# Altium PCB layout.PcbDoc (part 3 of 11)
Units mil, origin at the board's own origin, x right, y up, seen from the top; angles counter-clockwise.
Board outline 3543.31 x 3149.61 mil, 2 copper layers (Top Layer, Bottom Layer); 78 components, 73 nets, 327 pads, 143 vias.
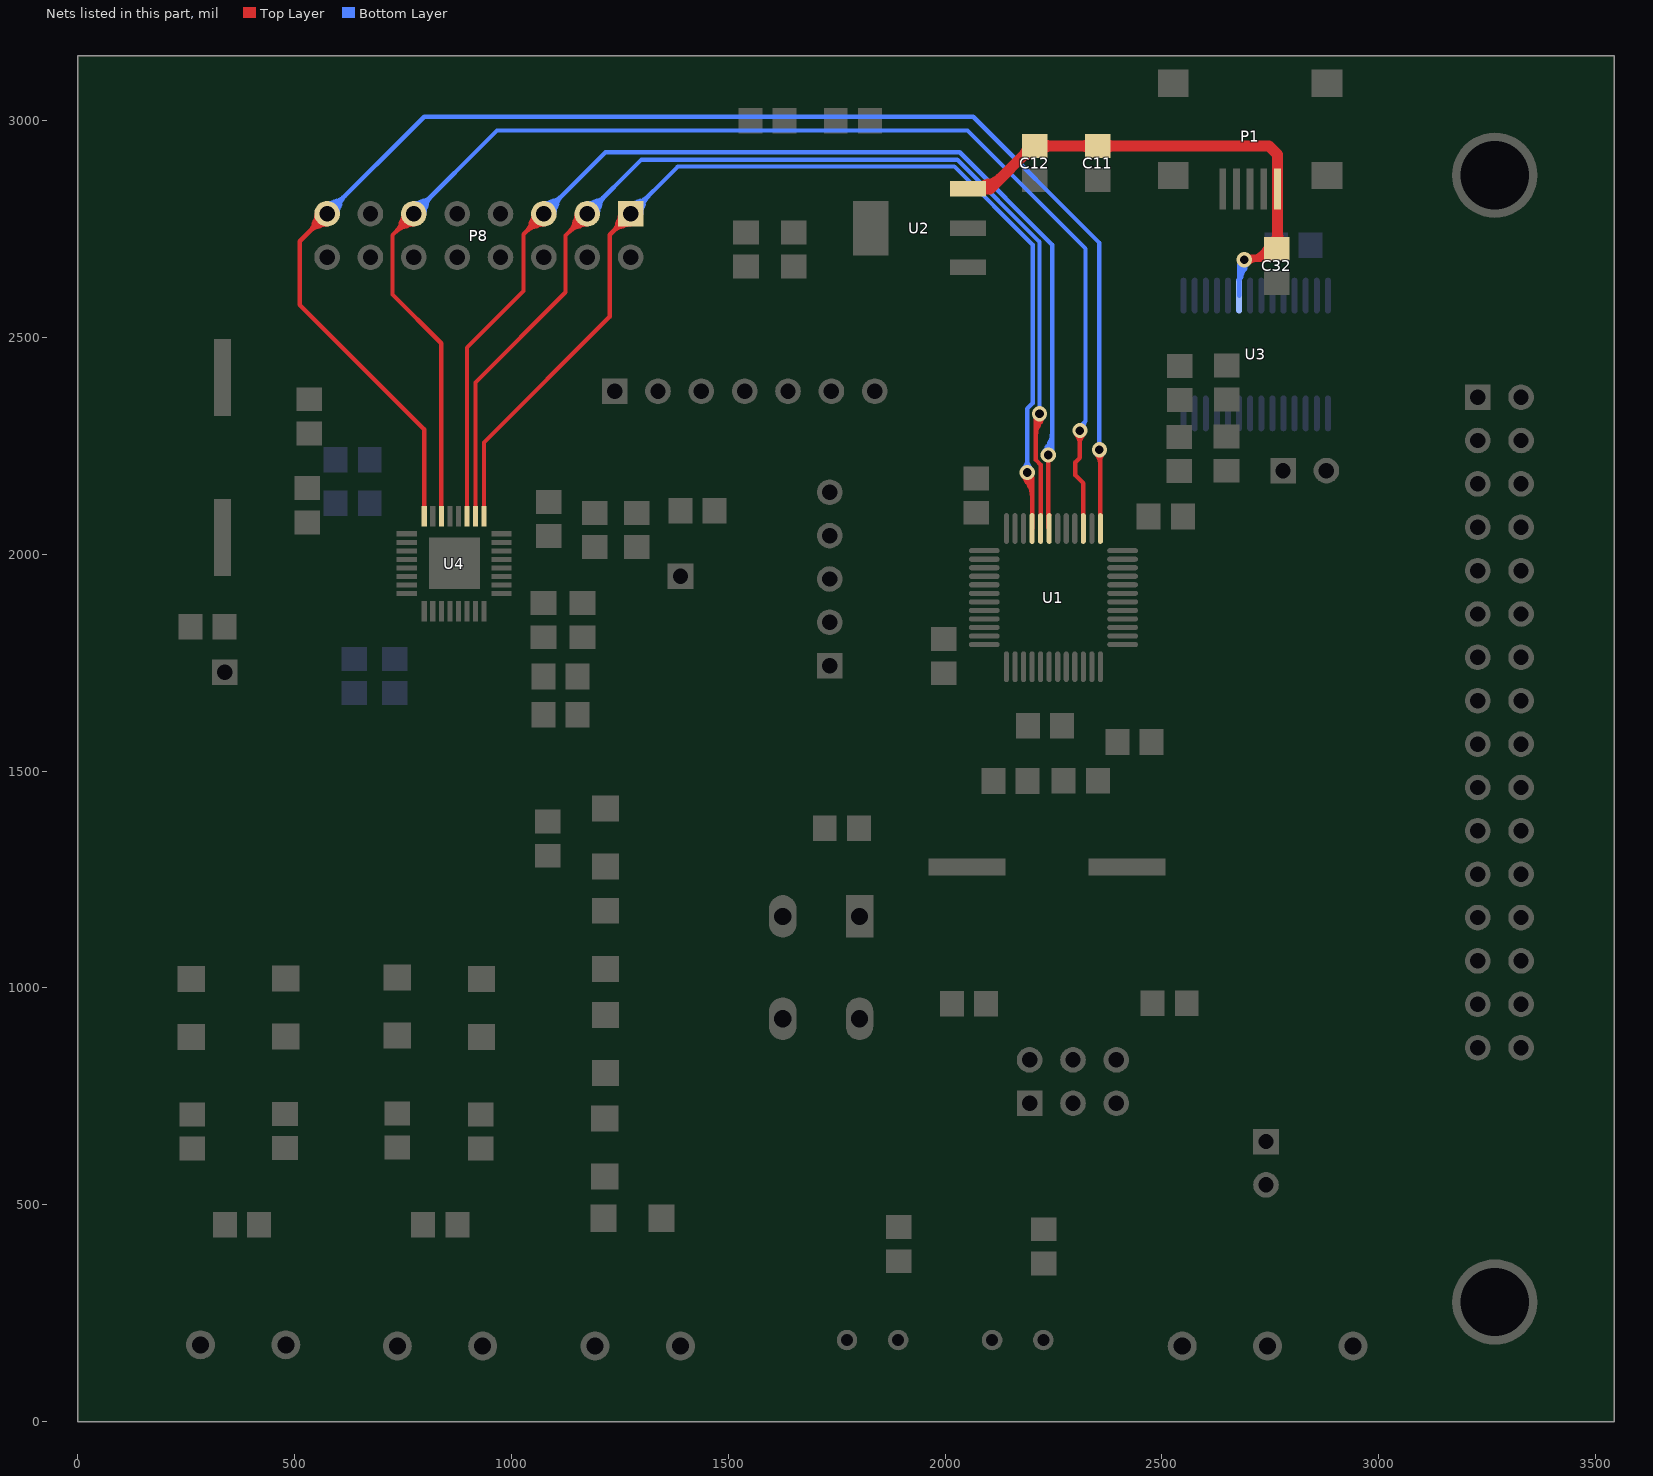
[diagram p3: the nets of this part, all layers, seen from the top]

## Via types
v1: diameter 35, hole 20, Top Layer to Bottom Layer, tented both sides, 113 vias
v2: diameter 35, hole 20, Top Layer to Bottom Layer, 28 vias
v3: diameter 35.43, hole 35.43, Top Layer to Bottom Layer, 2 vias

## Nets (pads, with @x,y where several pads share a name; then routed paths per layer and width w, separated by ;. In a path a pad name is that pad's centre, name@x,y a point inside that pad or via, vN(x,y) a via of type N, cw(c..) or ccw(c..) an arc to the next point about the centre after c; other vN are vias at no path point) (continued)
5V: C11.2 C12.2 C32.2 P1.1 U2.3 U3.20 | length 7242.4
  Top Layer w10: C32.2@2766.55,2705.92 C32.2@2765,2704.37 2739.63,2679 v2(2690,2679) ; v2(2690,2679) ccw(c2690,2736.04) C32.2@2742.34,2713.35 ; v2(2690,2679) ccw(c2690,2736.04) C32.2@2742.34,2713.35 ; v2(2690,2679) ccw(c2690,2736.04) C32.2@2742.34,2713.35 ; v2(2690,2679) ccw(c2690,2736.04) C32.2@2742.34,2713.35 ; v2(2690,2679) ccw(c2690,2736.04) C32.2@2742.34,2713.35 ; v2@2696.42,2689.73 ccw(c2711.11,2714.29) 2718.52,2686.64 ; v2@2696.42,2689.73 ccw(c2711.11,2714.29) 2718.52,2686.64 ; v2@2696.42,2689.73 ccw(c2711.11,2714.29) 2718.52,2686.64 ; v2@2696.42,2689.73 ccw(c2711.11,2714.29) 2718.52,2686.64 ; v2@2696.42,2689.73 ccw(c2711.11,2714.29) 2718.52,2686.64 ; v2@2696.42,2689.73 ccw(c2711.11,2714.29) 2718.52,2686.64 ; v2@2696.42,2689.73 ccw(c2711.11,2714.29) 2718.52,2686.64 ; v2@2696.42,2689.73 ccw(c2711.11,2714.29) 2718.52,2686.64 ; v2@2696.42,2689.73 ccw(c2711.11,2714.29) 2718.52,2686.64 ; v2@2696.42,2689.73 ccw(c2711.11,2714.29) 2718.52,2686.64 ; v2@2696.42,2689.73 ccw(c2711.11,2714.29) 2718.52,2686.64 ; v2@2696.42,2689.73 ccw(c2711.11,2714.29) 2718.52,2686.64 ; v2@2696.42,2689.73 ccw(c2711.11,2714.29) 2718.52,2686.64 ; v2@2696.42,2689.73 ccw(c2711.11,2714.29) 2718.52,2686.64 ; v2@2696.42,2689.73 ccw(c2711.11,2714.29) 2718.52,2686.64 ; v2@2697.46,2689.03 ccw(c2715.87,2713.79) 2723.86,2683.99 ; v2@2697.46,2689.03 ccw(c2715.87,2713.79) 2723.86,2683.99 ; v2@2697.46,2689.03 ccw(c2715.87,2713.79) 2723.86,2683.99 ; v2@2697.46,2689.03 ccw(c2715.87,2713.79) 2723.86,2683.99 ; v2@2697.46,2689.03 ccw(c2715.87,2713.79) 2723.86,2683.99 ; v2@2697.46,2689.03 ccw(c2715.87,2713.79) 2723.86,2683.99 ; v2@2697.46,2689.03 ccw(c2715.87,2713.79) 2723.86,2683.99 ; v2@2697.46,2689.03 ccw(c2715.87,2713.79) 2723.86,2683.99 ; v2@2697.46,2689.03 ccw(c2715.87,2713.79) 2723.86,2683.99 ; v2@2697.46,2689.03 ccw(c2715.87,2713.79) 2723.86,2683.99 ; v2@2697.46,2689.03 ccw(c2715.87,2713.79) 2723.86,2683.99 ; v2@2697.46,2689.03 ccw(c2715.87,2713.79) 2723.86,2683.99 ; v2@2697.46,2689.03 ccw(c2715.87,2713.79) 2723.86,2683.99 ; v2@2697.46,2689.03 ccw(c2715.87,2713.79) 2723.86,2683.99 ; v2@2697.46,2689.03 ccw(c2715.87,2713.79) 2723.86,2683.99 ; v2@2698.84,2670.16 cw(c2720.18,2648.82) 2720.18,2679 ; v2@2698.84,2670.16 cw(c2720.18,2648.82) 2720.18,2679 ; v2@2698.84,2670.16 cw(c2720.18,2648.82) 2720.18,2679 ; v2@2698.84,2670.16 cw(c2720.18,2648.82) 2720.18,2679 ; v2@2698.84,2670.16 cw(c2720.18,2648.82) 2720.18,2679 ; v2@2698.84,2687.84 ccw(c2720.18,2709.18) 2720.18,2679 ; v2@2698.84,2687.84 ccw(c2720.18,2709.18) 2720.18,2679 ; v2@2698.84,2687.84 ccw(c2720.18,2709.18) 2720.18,2679 ; v2@2698.84,2687.84 ccw(c2720.18,2709.18) 2720.18,2679 ; v2@2698.84,2687.84 ccw(c2720.18,2709.18) 2720.18,2679 ; v2@2700.83,2672.75 cw(c2715.3,2664.39) 2710.97,2680.54 ; v2@2700.83,2672.75 cw(c2715.3,2664.39) 2710.97,2680.54 ; v2@2700.83,2672.75 cw(c2715.3,2664.39) 2710.97,2680.54 ; v2@2700.83,2672.75 cw(c2715.3,2664.39) 2710.97,2680.54 ; v2@2700.83,2672.75 cw(c2715.3,2664.39) 2710.97,2680.54 ; v2@2700.83,2672.75 cw(c2715.3,2664.39) 2710.97,2680.54 ; v2@2700.83,2672.75 cw(c2715.3,2664.39) 2710.97,2680.54 ; v2@2700.83,2672.75 cw(c2715.3,2664.39) 2710.97,2680.54 ; v2@2700.83,2672.75 cw(c2715.3,2664.39) 2710.97,2680.54 ; v2@2700.83,2672.75 cw(c2715.3,2664.39) 2710.97,2680.54 ; v2@2700.83,2672.75 cw(c2715.3,2664.39) 2710.97,2680.54 ; v2@2700.83,2672.75 cw(c2715.3,2664.39) 2710.97,2680.54 ; v2@2700.83,2672.75 cw(c2715.3,2664.39) 2710.97,2680.54 ; v2@2700.83,2672.75 cw(c2715.3,2664.39) 2710.97,2680.54 ; v2@2700.83,2672.75 cw(c2715.3,2664.39) 2710.97,2680.54 ; v2@2700.92,2672.92 cw(c2725.93,2658.99) 2718.52,2686.64 ; v2@2700.92,2672.92 cw(c2725.93,2658.99) 2718.52,2686.64 ; v2@2700.92,2672.92 cw(c2725.93,2658.99) 2718.52,2686.64 ; v2@2700.92,2672.92 cw(c2725.93,2658.99) 2718.52,2686.64 ; v2@2700.92,2672.92 cw(c2725.93,2658.99) 2718.52,2686.64 ; v2@2700.92,2672.92 cw(c2725.93,2658.99) 2718.52,2686.64 ; v2@2700.92,2672.92 cw(c2725.93,2658.99) 2718.52,2686.64 ; v2@2700.92,2672.92 cw(c2725.93,2658.99) 2718.52,2686.64 ; v2@2700.92,2672.92 cw(c2725.93,2658.99) 2718.52,2686.64 ; v2@2700.92,2672.92 cw(c2725.93,2658.99) 2718.52,2686.64 ; v2@2700.92,2672.92 cw(c2725.93,2658.99) 2718.52,2686.64 ; v2@2700.92,2672.92 cw(c2725.93,2658.99) 2718.52,2686.64 ; v2@2700.92,2672.92 cw(c2725.93,2658.99) 2718.52,2686.64 ; v2@2700.92,2672.92 cw(c2725.93,2658.99) 2718.52,2686.64 ; v2@2700.92,2672.92 cw(c2725.93,2658.99) 2718.52,2686.64 ; v2@2705.24,2679 ccw(c2705.24,2729.43) C32.2@2751.51,2709.37 ; v2@2705.24,2679 ccw(c2705.24,2729.43) C32.2@2751.51,2709.37 ; v2@2705.24,2679 ccw(c2705.24,2729.43) C32.2@2751.51,2709.37 ; v2@2705.24,2679 ccw(c2705.24,2729.43) C32.2@2751.51,2709.37 ; v2@2705.24,2679 ccw(c2705.24,2729.43) C32.2@2751.51,2709.37 ; 2720.48,2679 ccw(c2720.48,2722.83) C32.2@2760.68,2705.39 ; 2720.48,2679 ccw(c2720.48,2722.83) C32.2@2760.68,2705.39 ; 2720.48,2679 ccw(c2720.48,2722.83) C32.2@2760.68,2705.39 ; 2720.48,2679 ccw(c2720.48,2722.83) C32.2@2760.68,2705.39 ; 2720.48,2679 ccw(c2720.48,2722.83) C32.2@2760.68,2705.39 ; C32.2@2735.71,2679 ccw(c2735.71,2716.22) C32.2@2769.86,2701.41 ; C32.2@2735.71,2679 ccw(c2735.71,2716.22) C32.2@2769.86,2701.41 ; C32.2@2735.71,2679 ccw(c2735.71,2716.22) C32.2@2769.86,2701.41 ; C32.2@2735.71,2679 ccw(c2735.71,2716.22) C32.2@2769.86,2701.41 ; C32.2@2735.71,2679 ccw(c2735.71,2716.22) C32.2@2769.86,2701.41 ; C32.2@2737.88,2692.2 ccw(c2727.66,2700.31) C32.2@2740.62,2701.8 ; C32.2@2737.88,2692.2 ccw(c2727.66,2700.31) C32.2@2740.62,2701.8 ; C32.2@2737.88,2692.2 ccw(c2727.66,2700.31) C32.2@2740.62,2701.8 ; C32.2@2737.88,2692.2 ccw(c2727.66,2700.31) C32.2@2740.62,2701.8 ; C32.2@2737.88,2692.2 ccw(c2727.66,2700.31) C32.2@2740.62,2701.8 ; C32.2@2737.88,2692.2 ccw(c2727.66,2700.31) C32.2@2740.62,2701.8 ; C32.2@2737.88,2692.2 ccw(c2727.66,2700.31) C32.2@2740.62,2701.8 ; C32.2@2737.88,2692.2 ccw(c2727.66,2700.31) C32.2@2740.62,2701.8 ; C32.2@2737.88,2692.2 ccw(c2727.66,2700.31) C32.2@2740.62,2701.8 ; C32.2@2737.88,2692.2 ccw(c2727.66,2700.31) C32.2@2740.62,2701.8
  Top Layer w25: U2.3@2053.15,2842.52 2103.64,2842.52 2202.49,2941.37 C12.2@2207,2941.37 C11.2@2352,2941.37 2746.73,2941.37 2766.55,2921.55 P1.1@2766.55,2841.87 C32.2@2766.55,2705.92 ; U2.3@2076.77,2847.74 ccw(c2076.77,2925.2) 2131.54,2870.42 ; U2.3@2076.77,2847.74 ccw(c2076.77,2925.2) 2131.54,2870.42 ; U2.3@2076.77,2847.74 ccw(c2076.77,2925.2) 2131.54,2870.42 ; U2.3@2076.77,2847.74 ccw(c2076.77,2925.2) 2131.54,2870.42 ; U2.3@2076.77,2847.74 ccw(c2076.77,2925.2) 2131.54,2870.42 ; U2.3@2081.29,2839.91 cw(c2107.09,2825.01) 2099.38,2853.79 ; U2.3@2081.29,2839.91 cw(c2107.09,2825.01) 2099.38,2853.79 ; U2.3@2081.29,2839.91 cw(c2107.09,2825.01) 2099.38,2853.79 ; U2.3@2081.29,2839.91 cw(c2107.09,2825.01) 2099.38,2853.79 ; U2.3@2081.29,2839.91 cw(c2107.09,2825.01) 2099.38,2853.79 ; U2.3@2081.29,2839.91 cw(c2107.09,2825.01) 2099.38,2853.79 ; U2.3@2081.29,2839.91 cw(c2107.09,2825.01) 2099.38,2853.79 ; U2.3@2081.29,2839.91 cw(c2107.09,2825.01) 2099.38,2853.79 ; U2.3@2081.29,2839.91 cw(c2107.09,2825.01) 2099.38,2853.79 ; U2.3@2081.29,2839.91 cw(c2107.09,2825.01) 2099.38,2853.79 ; 2174.99,2913.87 cw(c2205.03,2883.82) C12.2@2205.03,2926.31 ; 2174.99,2913.87 cw(c2205.03,2883.82) C12.2@2205.03,2926.31 ; 2174.99,2913.87 cw(c2205.03,2883.82) C12.2@2205.03,2926.31 ; 2174.99,2913.87 cw(c2205.03,2883.82) C12.2@2205.03,2926.31 ; 2174.99,2913.87 cw(c2205.03,2883.82) C12.2@2205.03,2926.31 ; C12.2@2181.12,2920 ccw(c2159.75,2941.37) C12.2@2189.97,2941.37 ; C12.2@2181.12,2920 ccw(c2159.75,2941.37) C12.2@2189.97,2941.37 ; C12.2@2181.12,2920 ccw(c2159.75,2941.37) C12.2@2189.97,2941.37 ; C12.2@2181.12,2920 ccw(c2159.75,2941.37) C12.2@2189.97,2941.37 ; C12.2@2181.12,2920 ccw(c2159.75,2941.37) C12.2@2189.97,2941.37 ; C12.2@2219.62,2930.72 cw(c2245.32,2905.02) 2245.32,2941.37 ; C12.2@2219.62,2930.72 cw(c2245.32,2905.02) 2245.32,2941.37 ; C12.2@2219.62,2930.72 cw(c2245.32,2905.02) 2245.32,2941.37 ; C12.2@2219.62,2930.72 cw(c2245.32,2905.02) 2245.32,2941.37 ; C12.2@2219.62,2930.72 cw(c2245.32,2905.02) 2245.32,2941.37 ; C12.2@2219.62,2952.02 ccw(c2245.32,2977.73) 2245.32,2941.37 ; C12.2@2219.62,2952.02 ccw(c2245.32,2977.73) 2245.32,2941.37 ; C12.2@2219.62,2952.02 ccw(c2245.32,2977.73) 2245.32,2941.37 ; C12.2@2219.62,2952.02 ccw(c2245.32,2977.73) 2245.32,2941.37 ; C12.2@2219.62,2952.02 ccw(c2245.32,2977.73) 2245.32,2941.37 ; 2313.68,2941.37 cw(c2313.68,2905.02) C11.2@2339.38,2930.72 ; 2313.68,2941.37 ccw(c2313.68,2977.73) C11.2@2339.38,2952.02 ; 2313.68,2941.37 cw(c2313.68,2905.02) C11.2@2339.38,2930.72 ; 2313.68,2941.37 ccw(c2313.68,2977.73) C11.2@2339.38,2952.02 ; 2313.68,2941.37 cw(c2313.68,2905.02) C11.2@2339.38,2930.72 ; 2313.68,2941.37 ccw(c2313.68,2977.73) C11.2@2339.38,2952.02 ; 2313.68,2941.37 cw(c2313.68,2905.02) C11.2@2339.38,2930.72 ; 2313.68,2941.37 ccw(c2313.68,2977.73) C11.2@2339.38,2952.02 ; 2313.68,2941.37 cw(c2313.68,2905.02) C11.2@2339.38,2930.72 ; 2313.68,2941.37 ccw(c2313.68,2977.73) C11.2@2339.38,2952.02 ; C11.2@2364.62,2930.72 cw(c2390.32,2905.02) 2390.32,2941.37 ; C11.2@2364.62,2930.72 cw(c2390.32,2905.02) 2390.32,2941.37 ; C11.2@2364.62,2930.72 cw(c2390.32,2905.02) 2390.32,2941.37 ; C11.2@2364.62,2930.72 cw(c2390.32,2905.02) 2390.32,2941.37 ; C11.2@2364.62,2930.72 cw(c2390.32,2905.02) 2390.32,2941.37 ; C11.2@2364.62,2952.02 ccw(c2390.32,2977.73) 2390.32,2941.37 ; C11.2@2364.62,2952.02 ccw(c2390.32,2977.73) 2390.32,2941.37 ; C11.2@2364.62,2952.02 ccw(c2390.32,2977.73) 2390.32,2941.37 ; C11.2@2364.62,2952.02 ccw(c2390.32,2977.73) 2390.32,2941.37 ; C11.2@2364.62,2952.02 ccw(c2390.32,2977.73) 2390.32,2941.37 ; C32.2@2756.32,2715.02 ccw(c2731.62,2739.72) 2766.55,2739.72 ; C32.2@2756.32,2715.02 ccw(c2731.62,2739.72) 2766.55,2739.72 ; C32.2@2756.32,2715.02 ccw(c2731.62,2739.72) 2766.55,2739.72 ; C32.2@2756.32,2715.02 ccw(c2731.62,2739.72) 2766.55,2739.72 ; C32.2@2756.32,2715.02 ccw(c2731.62,2739.72) 2766.55,2739.72 ; 2766.55,2741.73 ccw(c2804.33,2741.73) C32.2@2777.62,2715.02 ; 2766.55,2741.73 ccw(c2804.33,2741.73) C32.2@2777.62,2715.02 ; 2766.55,2741.73 ccw(c2804.33,2741.73) C32.2@2777.62,2715.02 ; 2766.55,2741.73 ccw(c2804.33,2741.73) C32.2@2777.62,2715.02 ; 2766.55,2741.73 ccw(c2804.33,2741.73) C32.2@2777.62,2715.02
  Bottom Layer w10: U3.20@2678.15,2596.46 2678.15,2667.15 v2(2690,2679) ; U3.20@2677.21,2632.54 ccw(c2670.2,2644.67) 2683.73,2641.05 ; U3.20@2677.21,2632.54 ccw(c2670.2,2644.67) 2683.73,2641.05 ; U3.20@2677.21,2632.54 ccw(c2670.2,2644.67) 2683.73,2641.05 ; U3.20@2677.21,2632.54 ccw(c2670.2,2644.67) 2683.73,2641.05 ; U3.20@2677.21,2632.54 ccw(c2670.2,2644.67) 2683.73,2641.05 ; U3.20@2677.21,2632.54 ccw(c2670.2,2644.67) 2683.73,2641.05 ; U3.20@2677.21,2632.54 ccw(c2670.2,2644.67) 2683.73,2641.05 ; U3.20@2677.21,2632.54 ccw(c2670.2,2644.67) 2683.73,2641.05 ; U3.20@2677.21,2632.54 ccw(c2670.2,2644.67) 2683.73,2641.05 ; U3.20@2677.21,2632.54 ccw(c2670.2,2644.67) 2683.73,2641.05 ; U3.20@2678.15,2620.21 cw(c2748.79,2620.21) v2@2698.84,2670.16 ; U3.20@2678.15,2620.21 cw(c2748.79,2620.21) v2@2698.84,2670.16 ; U3.20@2678.15,2620.21 cw(c2748.79,2620.21) v2@2698.84,2670.16 ; U3.20@2678.15,2620.21 cw(c2748.79,2620.21) v2@2698.84,2670.16 ; U3.20@2678.15,2620.21 cw(c2748.79,2620.21) v2@2698.84,2670.16 ; 2678.15,2644.36 cw(c2724.64,2644.36) v2@2691.77,2677.23 ; 2678.15,2644.36 cw(c2724.64,2644.36) v2@2691.77,2677.23 ; 2678.15,2644.36 cw(c2724.64,2644.36) v2@2691.77,2677.23 ; 2678.15,2644.36 cw(c2724.64,2644.36) v2@2691.77,2677.23 ; 2678.15,2644.36 cw(c2724.64,2644.36) v2@2691.77,2677.23 ; v2@2679.79,2671.79 cw(c2669.01,2664.19) 2680.43,2657.6 ; v2@2679.79,2671.79 cw(c2669.01,2664.19) 2680.43,2657.6 ; v2@2679.79,2671.79 cw(c2669.01,2664.19) 2680.43,2657.6 ; v2@2679.79,2671.79 cw(c2669.01,2664.19) 2680.43,2657.6 ; v2@2679.79,2671.79 cw(c2669.01,2664.19) 2680.43,2657.6 ; v2@2679.79,2671.79 cw(c2669.01,2664.19) 2680.43,2657.6 ; v2@2679.79,2671.79 cw(c2669.01,2664.19) 2680.43,2657.6 ; v2@2679.79,2671.79 cw(c2669.01,2664.19) 2680.43,2657.6 ; v2@2679.79,2671.79 cw(c2669.01,2664.19) 2680.43,2657.6 ; v2@2679.79,2671.79 cw(c2669.01,2664.19) 2680.43,2657.6 ; 2680.43,2657.6 cw(c2697.32,2647.85) v2@2692.86,2666.83 ; 2680.43,2657.6 cw(c2697.32,2647.85) v2@2692.86,2666.83 ; 2680.43,2657.6 cw(c2697.32,2647.85) v2@2692.86,2666.83 ; 2680.43,2657.6 cw(c2697.32,2647.85) v2@2692.86,2666.83 ; 2680.43,2657.6 cw(c2697.32,2647.85) v2@2692.86,2666.83 ; 2680.43,2657.6 cw(c2697.32,2647.85) v2@2692.86,2666.83 ; 2680.43,2657.6 cw(c2697.32,2647.85) v2@2692.86,2666.83 ; 2680.43,2657.6 cw(c2697.32,2647.85) v2@2692.86,2666.83 ; 2680.43,2657.6 cw(c2697.32,2647.85) v2@2692.86,2666.83 ; 2680.43,2657.6 cw(c2697.32,2647.85) v2@2692.86,2666.83 ; v2@2680.95,2670.37 cw(c2665.24,2655.39) 2684.04,2644.53 ; v2@2680.95,2670.37 cw(c2665.24,2655.39) 2684.04,2644.53 ; v2@2680.95,2670.37 cw(c2665.24,2655.39) 2684.04,2644.53 ; v2@2680.95,2670.37 cw(c2665.24,2655.39) 2684.04,2644.53 ; v2@2680.95,2670.37 cw(c2665.24,2655.39) 2684.04,2644.53 ; v2@2680.95,2670.37 cw(c2665.24,2655.39) 2684.04,2644.53 ; v2@2680.95,2670.37 cw(c2665.24,2655.39) 2684.04,2644.53 ; v2@2680.95,2670.37 cw(c2665.24,2655.39) 2684.04,2644.53 ; v2@2680.95,2670.37 cw(c2665.24,2655.39) 2684.04,2644.53 ; v2@2680.95,2670.37 cw(c2665.24,2655.39) 2684.04,2644.53 ; v2@2688.19,2677.27 cw(c2675.31,2665) 2690.72,2656.1 ; v2@2688.19,2677.27 cw(c2675.31,2665) 2690.72,2656.1 ; v2@2688.19,2677.27 cw(c2675.31,2665) 2690.72,2656.1 ; v2@2688.19,2677.27 cw(c2675.31,2665) 2690.72,2656.1 ; v2@2688.19,2677.27 cw(c2675.31,2665) 2690.72,2656.1 ; v2@2688.19,2677.27 cw(c2675.31,2665) 2690.72,2656.1 ; v2@2688.19,2677.27 cw(c2675.31,2665) 2690.72,2656.1 ; v2@2688.19,2677.27 cw(c2675.31,2665) 2690.72,2656.1 ; v2@2688.19,2677.27 cw(c2675.31,2665) 2690.72,2656.1 ; v2@2688.19,2677.27 cw(c2675.31,2665) 2690.72,2656.1
9153_CF1: P8.3 U1.32 U4.26 | length 6602.8
  Top Layer w10: U4.26@917.19,2087.57 917.19,2396.19 1125,2604 1125,2735 P8.3@1175,2785 ; v2@2209.5,2315.5 2209.5,2217.2 2220.47,2206.22 U1.32@2220.47,2059.45 ; 1133.13,2743.13 cw(c1175,2701.26) P8.3@1175,2760.47 ; 1133.13,2743.13 ccw(c1091.26,2785) P8.3@1150.47,2785 ; 1133.13,2743.13 cw(c1175,2701.26) P8.3@1175,2760.47 ; 1133.13,2743.13 ccw(c1091.26,2785) P8.3@1150.47,2785 ; 1133.13,2743.13 cw(c1175,2701.26) P8.3@1175,2760.47 ; 1133.13,2743.13 ccw(c1091.26,2785) P8.3@1150.47,2785 ; 1133.13,2743.13 cw(c1175,2701.26) P8.3@1175,2760.47 ; 1133.13,2743.13 ccw(c1091.26,2785) P8.3@1150.47,2785 ; 1133.13,2743.13 cw(c1175,2701.26) P8.3@1175,2760.47 ; 1133.13,2743.13 ccw(c1091.26,2785) P8.3@1150.47,2785 ; 1144.48,2762.65 cw(c1181.61,2752.7) P8.3@1173.9,2790.36 ; 1144.48,2762.65 cw(c1181.61,2752.7) P8.3@1173.9,2790.36 ; 1144.48,2762.65 cw(c1181.61,2752.7) P8.3@1173.9,2790.36 ; 1144.48,2762.65 cw(c1181.61,2752.7) P8.3@1173.9,2790.36 ; 1144.48,2762.65 cw(c1181.61,2752.7) P8.3@1173.9,2790.36 ; 1144.48,2762.65 cw(c1181.61,2752.7) P8.3@1173.9,2790.36 ; 1144.48,2762.65 cw(c1181.61,2752.7) P8.3@1173.9,2790.36 ; 1144.48,2762.65 cw(c1181.61,2752.7) P8.3@1173.9,2790.36 ; 1144.48,2762.65 cw(c1181.61,2752.7) P8.3@1173.9,2790.36 ; 1144.48,2762.65 cw(c1181.61,2752.7) P8.3@1173.9,2790.36 ; 1150.2,2760.2 cw(c1175,2735.4) P8.3@1175,2770.47 ; 1150.2,2760.2 ccw(c1125.4,2785) P8.3@1160.47,2785 ; 1150.2,2760.2 cw(c1175,2735.4) P8.3@1175,2770.47 ; 1150.2,2760.2 ccw(c1125.4,2785) P8.3@1160.47,2785 ; 1150.2,2760.2 cw(c1175,2735.4) P8.3@1175,2770.47 ; 1150.2,2760.2 ccw(c1125.4,2785) P8.3@1160.47,2785 ; 1150.2,2760.2 cw(c1175,2735.4) P8.3@1175,2770.47 ; 1150.2,2760.2 ccw(c1125.4,2785) P8.3@1160.47,2785 ; 1150.2,2760.2 cw(c1175,2735.4) P8.3@1175,2770.47 ; 1150.2,2760.2 ccw(c1125.4,2785) P8.3@1160.47,2785 ; 1152.65,2754.48 ccw(c1142.7,2791.61) P8.3@1180.36,2783.9 ; 1152.65,2754.48 ccw(c1142.7,2791.61) P8.3@1180.36,2783.9 ; 1152.65,2754.48 ccw(c1142.7,2791.61) P8.3@1180.36,2783.9 ; 1152.65,2754.48 ccw(c1142.7,2791.61) P8.3@1180.36,2783.9 ; 1152.65,2754.48 ccw(c1142.7,2791.61) P8.3@1180.36,2783.9 ; 1152.65,2754.48 ccw(c1142.7,2791.61) P8.3@1180.36,2783.9 ; 1152.65,2754.48 ccw(c1142.7,2791.61) P8.3@1180.36,2783.9 ; 1152.65,2754.48 ccw(c1142.7,2791.61) P8.3@1180.36,2783.9 ; 1152.65,2754.48 ccw(c1142.7,2791.61) P8.3@1180.36,2783.9 ; 1152.65,2754.48 ccw(c1142.7,2791.61) P8.3@1180.36,2783.9 ; 2209.5,2273.3 cw(c2268.7,2273.3) v2@2226.84,2315.16 ; 2209.5,2273.3 cw(c2268.7,2273.3) v2@2226.84,2315.16 ; 2209.5,2273.3 cw(c2268.7,2273.3) v2@2226.84,2315.16 ; 2209.5,2273.3 cw(c2268.7,2273.3) v2@2226.84,2315.16 ; 2209.5,2273.3 cw(c2268.7,2273.3) v2@2226.84,2315.16 ; 2209.5,2297.44 cw(c2244.56,2297.44) v2@2219.77,2322.23 ; 2209.5,2297.44 cw(c2244.56,2297.44) v2@2219.77,2322.23 ; 2209.5,2297.44 cw(c2244.56,2297.44) v2@2219.77,2322.23 ; 2209.5,2297.44 cw(c2244.56,2297.44) v2@2219.77,2322.23 ; 2209.5,2297.44 cw(c2244.56,2297.44) v2@2219.77,2322.23 ; v2@2210.8,2313.78 cw(c2202.43,2301.92) 2215,2294.66 ; v2@2210.8,2313.78 cw(c2202.43,2301.92) 2215,2294.66 ; v2@2210.8,2313.78 cw(c2202.43,2301.92) 2215,2294.66 ; v2@2210.8,2313.78 cw(c2202.43,2301.92) 2215,2294.66 ; v2@2210.8,2313.78 cw(c2202.43,2301.92) 2215,2294.66 ; v2@2210.8,2313.78 cw(c2202.43,2301.92) 2215,2294.66 ; v2@2210.8,2313.78 cw(c2202.43,2301.92) 2215,2294.66 ; v2@2210.8,2313.78 cw(c2202.43,2301.92) 2215,2294.66 ; v2@2210.8,2313.78 cw(c2202.43,2301.92) 2215,2294.66 ; v2@2210.8,2313.78 cw(c2202.43,2301.92) 2215,2294.66 ; v2@2216.56,2321.96 cw(c2208.77,2310.9) 2220.48,2304.14 ; v2@2216.56,2321.96 cw(c2208.77,2310.9) 2220.48,2304.14 ; v2@2216.56,2321.96 cw(c2208.77,2310.9) 2220.48,2304.14 ; v2@2216.56,2321.96 cw(c2208.77,2310.9) 2220.48,2304.14 ; v2@2216.56,2321.96 cw(c2208.77,2310.9) 2220.48,2304.14 ; v2@2216.56,2321.96 cw(c2208.77,2310.9) 2220.48,2304.14 ; v2@2216.56,2321.96 cw(c2208.77,2310.9) 2220.48,2304.14 ; v2@2216.56,2321.96 cw(c2208.77,2310.9) 2220.48,2304.14 ; v2@2216.56,2321.96 cw(c2208.77,2310.9) 2220.48,2304.14 ; v2@2216.56,2321.96 cw(c2208.77,2310.9) 2220.48,2304.14
  Bottom Layer w10: P8.3@1175,2785 1300,2910 2028.24,2910 2218,2720.24 v2(2218,2324) ; P8.3@1169.64,2786.1 cw(c1207.3,2778.39) 1197.35,2815.52 ; P8.3@1169.64,2786.1 cw(c1207.3,2778.39) 1197.35,2815.52 ; P8.3@1169.64,2786.1 cw(c1207.3,2778.39) 1197.35,2815.52 ; P8.3@1169.64,2786.1 cw(c1207.3,2778.39) 1197.35,2815.52 ; P8.3@1169.64,2786.1 cw(c1207.3,2778.39) 1197.35,2815.52 ; P8.3@1169.64,2786.1 cw(c1207.3,2778.39) 1197.35,2815.52 ; P8.3@1169.64,2786.1 cw(c1207.3,2778.39) 1197.35,2815.52 ; P8.3@1169.64,2786.1 cw(c1207.3,2778.39) 1197.35,2815.52 ; P8.3@1169.64,2786.1 cw(c1207.3,2778.39) 1197.35,2815.52 ; P8.3@1169.64,2786.1 cw(c1207.3,2778.39) 1197.35,2815.52 ; P8.3@1175,2799.53 ccw(c1175,2834.6) 1199.8,2809.8 ; P8.3@1175,2799.53 ccw(c1175,2834.6) 1199.8,2809.8 ; P8.3@1175,2799.53 ccw(c1175,2834.6) 1199.8,2809.8 ; P8.3@1175,2799.53 ccw(c1175,2834.6) 1199.8,2809.8 ; P8.3@1175,2799.53 ccw(c1175,2834.6) 1199.8,2809.8 ; P8.3@1175,2809.53 ccw(c1175,2868.74) 1216.87,2826.87 ; P8.3@1175,2809.53 ccw(c1175,2868.74) 1216.87,2826.87 ; P8.3@1175,2809.53 ccw(c1175,2868.74) 1216.87,2826.87 ; P8.3@1175,2809.53 ccw(c1175,2868.74) 1216.87,2826.87 ; P8.3@1175,2809.53 ccw(c1175,2868.74) 1216.87,2826.87 ; P8.3@1176.1,2779.64 ccw(c1168.39,2817.3) 1205.52,2807.35 ; P8.3@1176.1,2779.64 ccw(c1168.39,2817.3) 1205.52,2807.35 ; P8.3@1176.1,2779.64 ccw(c1168.39,2817.3) 1205.52,2807.35 ; P8.3@1176.1,2779.64 ccw(c1168.39,2817.3) 1205.52,2807.35 ; P8.3@1176.1,2779.64 ccw(c1168.39,2817.3) 1205.52,2807.35 ; P8.3@1176.1,2779.64 ccw(c1168.39,2817.3) 1205.52,2807.35 ; P8.3@1176.1,2779.64 ccw(c1168.39,2817.3) 1205.52,2807.35 ; P8.3@1176.1,2779.64 ccw(c1168.39,2817.3) 1205.52,2807.35 ; P8.3@1176.1,2779.64 ccw(c1168.39,2817.3) 1205.52,2807.35 ; P8.3@1176.1,2779.64 ccw(c1168.39,2817.3) 1205.52,2807.35 ; P8.3@1189.53,2785 cw(c1224.6,2785) 1199.8,2809.8 ; P8.3@1189.53,2785 cw(c1224.6,2785) 1199.8,2809.8 ; P8.3@1189.53,2785 cw(c1224.6,2785) 1199.8,2809.8 ; P8.3@1189.53,2785 cw(c1224.6,2785) 1199.8,2809.8 ; P8.3@1189.53,2785 cw(c1224.6,2785) 1199.8,2809.8 ; P8.3@1199.53,2785 cw(c1258.74,2785) 1216.87,2826.87 ; P8.3@1199.53,2785 cw(c1258.74,2785) 1216.87,2826.87 ; P8.3@1199.53,2785 cw(c1258.74,2785) 1216.87,2826.87 ; P8.3@1199.53,2785 cw(c1258.74,2785) 1216.87,2826.87 ; P8.3@1199.53,2785 cw(c1258.74,2785) 1216.87,2826.87
9153_CF2: P8.1 U1.33 U4.25 | length 7189.3
  Top Layer w10: U4.25@936.87,2087.57 936.87,2257.87 1227,2548 1227,2737 P8.1@1275,2785 ; v2(2189.5,2188.5) 2200.79,2177.21 U1.33@2200.79,2059.45 ; 1233.13,2743.13 cw(c1275,2701.26) P8.1@1275,2760.47 ; 1233.13,2743.13 ccw(c1191.26,2785) P8.1@1250.47,2785 ; 1233.13,2743.13 cw(c1275,2701.26) P8.1@1275,2760.47 ; 1233.13,2743.13 ccw(c1191.26,2785) P8.1@1250.47,2785 ; 1233.13,2743.13 cw(c1275,2701.26) P8.1@1275,2760.47 ; 1233.13,2743.13 ccw(c1191.26,2785) P8.1@1250.47,2785 ; 1233.13,2743.13 cw(c1275,2701.26) P8.1@1275,2760.47 ; 1233.13,2743.13 ccw(c1191.26,2785) P8.1@1250.47,2785 ; 1233.13,2743.13 cw(c1275,2701.26) P8.1@1275,2760.47 ; 1233.13,2743.13 ccw(c1191.26,2785) P8.1@1250.47,2785 ; 1244.48,2762.65 cw(c1281.61,2752.7) P8.1@1273.9,2790.36 ; 1244.48,2762.65 cw(c1281.61,2752.7) P8.1@1273.9,2790.36 ; 1244.48,2762.65 cw(c1281.61,2752.7) P8.1@1273.9,2790.36 ; 1244.48,2762.65 cw(c1281.61,2752.7) P8.1@1273.9,2790.36 ; 1244.48,2762.65 cw(c1281.61,2752.7) P8.1@1273.9,2790.36 ; 1244.48,2762.65 cw(c1281.61,2752.7) P8.1@1273.9,2790.36 ; 1244.48,2762.65 cw(c1281.61,2752.7) P8.1@1273.9,2790.36 ; 1244.48,2762.65 cw(c1281.61,2752.7) P8.1@1273.9,2790.36 ; 1244.48,2762.65 cw(c1281.61,2752.7) P8.1@1273.9,2790.36 ; 1244.48,2762.65 cw(c1281.61,2752.7) P8.1@1273.9,2790.36 ; P8.1@1250.2,2760.2 cw(c1275,2735.4) P8.1@1275,2770.47 ; P8.1@1250.2,2760.2 ccw(c1225.4,2785) P8.1@1260.47,2785 ; P8.1@1250.2,2760.2 cw(c1275,2735.4) P8.1@1275,2770.47 ; P8.1@1250.2,2760.2 ccw(c1225.4,2785) P8.1@1260.47,2785 ; P8.1@1250.2,2760.2 cw(c1275,2735.4) P8.1@1275,2770.47 ; P8.1@1250.2,2760.2 ccw(c1225.4,2785) P8.1@1260.47,2785 ; P8.1@1250.2,2760.2 cw(c1275,2735.4) P8.1@1275,2770.47 ; P8.1@1250.2,2760.2 ccw(c1225.4,2785) P8.1@1260.47,2785 ; P8.1@1250.2,2760.2 cw(c1275,2735.4) P8.1@1275,2770.47 ; P8.1@1250.2,2760.2 ccw(c1225.4,2785) P8.1@1260.47,2785 ; 1252.65,2754.48 ccw(c1242.7,2791.61) P8.1@1280.36,2783.9 ; 1252.65,2754.48 ccw(c1242.7,2791.61) P8.1@1280.36,2783.9 ; 1252.65,2754.48 ccw(c1242.7,2791.61) P8.1@1280.36,2783.9 ; 1252.65,2754.48 ccw(c1242.7,2791.61) P8.1@1280.36,2783.9 ; 1252.65,2754.48 ccw(c1242.7,2791.61) P8.1@1280.36,2783.9 ; 1252.65,2754.48 ccw(c1242.7,2791.61) P8.1@1280.36,2783.9 ; 1252.65,2754.48 ccw(c1242.7,2791.61) P8.1@1280.36,2783.9 ; 1252.65,2754.48 ccw(c1242.7,2791.61) P8.1@1280.36,2783.9 ; 1252.65,2754.48 ccw(c1242.7,2791.61) P8.1@1280.36,2783.9 ; 1252.65,2754.48 ccw(c1242.7,2791.61) P8.1@1280.36,2783.9 ; v2@2180.66,2179.66 cw(c2132.07,2131.07) 2200.79,2131.07 ; v2@2180.66,2179.66 cw(c2132.07,2131.07) 2200.79,2131.07 ; v2@2180.66,2179.66 cw(c2132.07,2131.07) 2200.79,2131.07 ; v2@2180.66,2179.66 cw(c2132.07,2131.07) 2200.79,2131.07 ; v2@2180.66,2179.66 cw(c2132.07,2131.07) 2200.79,2131.07 ; v2@2187.03,2176.25 cw(c2183.63,2159.33) 2198.57,2167.96 ; v2@2187.03,2176.25 cw(c2183.63,2159.33) 2198.57,2167.96 ; v2@2187.03,2176.25 cw(c2183.63,2159.33) 2198.57,2167.96 ; v2@2187.03,2176.25 cw(c2183.63,2159.33) 2198.57,2167.96 ; v2@2187.03,2176.25 cw(c2183.63,2159.33) 2198.57,2167.96 ; v2@2187.03,2176.25 cw(c2183.63,2159.33) 2198.57,2167.96 ; v2@2187.03,2176.25 cw(c2183.63,2159.33) 2198.57,2167.96 ; v2@2187.03,2176.25 cw(c2183.63,2159.33) 2198.57,2167.96 ; v2@2187.03,2176.25 cw(c2183.63,2159.33) 2198.57,2167.96 ; v2@2187.03,2176.25 cw(c2183.63,2159.33) 2198.57,2167.96 ; v2@2187.73,2186.73 cw(c2156.21,2155.21) 2200.79,2155.21 ; v2@2187.73,2186.73 cw(c2156.21,2155.21) 2200.79,2155.21 ; v2@2187.73,2186.73 cw(c2156.21,2155.21) 2200.79,2155.21 ; v2@2187.73,2186.73 cw(c2156.21,2155.21) 2200.79,2155.21 ; v2@2187.73,2186.73 cw(c2156.21,2155.21) 2200.79,2155.21 ; 2188.48,2166.11 cw(c2203.22,2174.62) v2@2191.26,2186.72 ; 2188.48,2166.11 cw(c2203.22,2174.62) v2@2191.26,2186.72 ; 2188.48,2166.11 cw(c2203.22,2174.62) v2@2191.26,2186.72 ; 2188.48,2166.11 cw(c2203.22,2174.62) v2@2191.26,2186.72 ; 2188.48,2166.11 cw(c2203.22,2174.62) v2@2191.26,2186.72 ; 2188.48,2166.11 cw(c2203.22,2174.62) v2@2191.26,2186.72 ; 2188.48,2166.11 cw(c2203.22,2174.62) v2@2191.26,2186.72 ; 2188.48,2166.11 cw(c2203.22,2174.62) v2@2191.26,2186.72 ; 2188.48,2166.11 cw(c2203.22,2174.62) v2@2191.26,2186.72 ; 2188.48,2166.11 cw(c2203.22,2174.62) v2@2191.26,2186.72 ; 2194.96,2154.89 cw(c2212.63,2165.1) v2@2198.29,2179.61 ; 2194.96,2154.89 cw(c2212.63,2165.1) v2@2198.29,2179.61 ; 2194.96,2154.89 cw(c2212.63,2165.1) v2@2198.29,2179.61 ; 2194.96,2154.89 cw(c2212.63,2165.1) v2@2198.29,2179.61 ; 2194.96,2154.89 cw(c2212.63,2165.1) v2@2198.29,2179.61 ; 2194.96,2154.89 cw(c2212.63,2165.1) v2@2198.29,2179.61 ; 2194.96,2154.89 cw(c2212.63,2165.1) v2@2198.29,2179.61 ; 2194.96,2154.89 cw(c2212.63,2165.1) v2@2198.29,2179.61 ; 2194.96,2154.89 cw(c2212.63,2165.1) v2@2198.29,2179.61 ; 2194.96,2154.89 cw(c2212.63,2165.1) v2@2198.29,2179.61 ; 2198.57,2167.96 cw(c2208.68,2173.79) v2@2199.42,2180.89 ; 2198.57,2167.96 cw(c2208.68,2173.79) v2@2199.42,2180.89 ; 2198.57,2167.96 cw(c2208.68,2173.79) v2@2199.42,2180.89 ; 2198.57,2167.96 cw(c2208.68,2173.79) v2@2199.42,2180.89 ; 2198.57,2167.96 cw(c2208.68,2173.79) v2@2199.42,2180.89 ; 2198.57,2167.96 cw(c2208.68,2173.79) v2@2199.42,2180.89 ; 2198.57,2167.96 cw(c2208.68,2173.79) v2@2199.42,2180.89 ; 2198.57,2167.96 cw(c2208.68,2173.79) v2@2199.42,2180.89 ; 2198.57,2167.96 cw(c2208.68,2173.79) v2@2199.42,2180.89 ; 2198.57,2167.96 cw(c2208.68,2173.79) v2@2199.42,2180.89
  Bottom Layer w10: P8.1@1275,2785 1384,2894 2021.61,2894 2202,2713.61 2202,2348.3 2189.5,2335.8 v2(2189.5,2188.5) ; P8.1@1269.64,2786.1 cw(c1307.3,2778.39) 1297.35,2815.52 ; P8.1@1269.64,2786.1 cw(c1307.3,2778.39) 1297.35,2815.52 ; P8.1@1269.64,2786.1 cw(c1307.3,2778.39) 1297.35,2815.52 ; P8.1@1269.64,2786.1 cw(c1307.3,2778.39) 1297.35,2815.52 ; P8.1@1269.64,2786.1 cw(c1307.3,2778.39) 1297.35,2815.52 ; P8.1@1269.64,2786.1 cw(c1307.3,2778.39) 1297.35,2815.52 ; P8.1@1269.64,2786.1 cw(c1307.3,2778.39) 1297.35,2815.52 ; P8.1@1269.64,2786.1 cw(c1307.3,2778.39) 1297.35,2815.52 ; P8.1@1269.64,2786.1 cw(c1307.3,2778.39) 1297.35,2815.52 ; P8.1@1269.64,2786.1 cw(c1307.3,2778.39) 1297.35,2815.52 ; P8.1@1275,2799.53 ccw(c1275,2834.6) P8.1@1299.8,2809.8 ; P8.1@1275,2799.53 ccw(c1275,2834.6) P8.1@1299.8,2809.8 ; P8.1@1275,2799.53 ccw(c1275,2834.6) P8.1@1299.8,2809.8 ; P8.1@1275,2799.53 ccw(c1275,2834.6) P8.1@1299.8,2809.8 ; P8.1@1275,2799.53 ccw(c1275,2834.6) P8.1@1299.8,2809.8 ; P8.1@1275,2809.53 ccw(c1275,2868.74) 1316.87,2826.87 ; P8.1@1275,2809.53 ccw(c1275,2868.74) 1316.87,2826.87 ; P8.1@1275,2809.53 ccw(c1275,2868.74) 1316.87,2826.87 ; P8.1@1275,2809.53 ccw(c1275,2868.74) 1316.87,2826.87 ; P8.1@1275,2809.53 ccw(c1275,2868.74) 1316.87,2826.87 ; P8.1@1276.1,2779.64 ccw(c1268.39,2817.3) 1305.52,2807.35 ; P8.1@1276.1,2779.64 ccw(c1268.39,2817.3) 1305.52,2807.35 ; P8.1@1276.1,2779.64 ccw(c1268.39,2817.3) 1305.52,2807.35 ; P8.1@1276.1,2779.64 ccw(c1268.39,2817.3) 1305.52,2807.35 ; P8.1@1276.1,2779.64 ccw(c1268.39,2817.3) 1305.52,2807.35 ; P8.1@1276.1,2779.64 ccw(c1268.39,2817.3) 1305.52,2807.35 ; P8.1@1276.1,2779.64 ccw(c1268.39,2817.3) 1305.52,2807.35 ; P8.1@1276.1,2779.64 ccw(c1268.39,2817.3) 1305.52,2807.35 ; P8.1@1276.1,2779.64 ccw(c1268.39,2817.3) 1305.52,2807.35 ; P8.1@1276.1,2779.64 ccw(c1268.39,2817.3) 1305.52,2807.35 ; P8.1@1289.53,2785 cw(c1324.6,2785) P8.1@1299.8,2809.8 ; P8.1@1289.53,2785 cw(c1324.6,2785) P8.1@1299.8,2809.8 ; P8.1@1289.53,2785 cw(c1324.6,2785) P8.1@1299.8,2809.8 ; P8.1@1289.53,2785 cw(c1324.6,2785) P8.1@1299.8,2809.8 ; P8.1@1289.53,2785 cw(c1324.6,2785) P8.1@1299.8,2809.8 ; P8.1@1299.53,2785 cw(c1358.74,2785) 1316.87,2826.87 ; P8.1@1299.53,2785 cw(c1358.74,2785) 1316.87,2826.87 ; P8.1@1299.53,2785 cw(c1358.74,2785) 1316.87,2826.87 ; P8.1@1299.53,2785 cw(c1358.74,2785) 1316.87,2826.87 ; P8.1@1299.53,2785 cw(c1358.74,2785) 1316.87,2826.87 ; v2@2180.66,2197.34 ccw(c2159.32,2218.68) 2189.5,2218.68 ; v2@2180.66,2197.34 ccw(c2159.32,2218.68) 2189.5,2218.68 ; v2@2180.66,2197.34 ccw(c2159.32,2218.68) 2189.5,2218.68 ; v2@2180.66,2197.34 ccw(c2159.32,2218.68) 2189.5,2218.68 ; v2@2180.66,2197.34 ccw(c2159.32,2218.68) 2189.5,2218.68 ; 2189.5,2218.68 ccw(c2219.68,2218.68) v2@2198.34,2197.34 ; 2189.5,2218.68 ccw(c2219.68,2218.68) v2@2198.34,2197.34 ; 2189.5,2218.68 ccw(c2219.68,2218.68) v2@2198.34,2197.34 ; 2189.5,2218.68 ccw(c2219.68,2218.68) v2@2198.34,2197.34 ; 2189.5,2218.68 ccw(c2219.68,2218.68) v2@2198.34,2197.34
9153_CSB: P8.15 U1.25 U4.32 | length 6916.4
  Top Layer w10: P8.15@575,2785 512,2722 512,2575 799.08,2287.92 U4.32@799.08,2087.57 ; v2(2356,2241) 2358.27,2238.73 U1.25@2358.27,2059.45 ; 533.13,2743.13 cw(c575,2701.26) P8.15@575,2760.47 ; 533.13,2743.13 ccw(c491.26,2785) P8.15@550.47,2785 ; 533.13,2743.13 cw(c575,2701.26) P8.15@575,2760.47 ; 533.13,2743.13 ccw(c491.26,2785) P8.15@550.47,2785 ; 533.13,2743.13 cw(c575,2701.26) P8.15@575,2760.47 ; 533.13,2743.13 ccw(c491.26,2785) P8.15@550.47,2785 ; 533.13,2743.13 cw(c575,2701.26) P8.15@575,2760.47 ; 533.13,2743.13 ccw(c491.26,2785) P8.15@550.47,2785 ; 533.13,2743.13 cw(c575,2701.26) P8.15@575,2760.47 ; 533.13,2743.13 ccw(c491.26,2785) P8.15@550.47,2785 ; 544.48,2762.65 cw(c581.61,2752.7) P8.15@573.9,2790.36 ; 544.48,2762.65 cw(c581.61,2752.7) P8.15@573.9,2790.36 ; 544.48,2762.65 cw(c581.61,2752.7) P8.15@573.9,2790.36 ; 544.48,2762.65 cw(c581.61,2752.7) P8.15@573.9,2790.36 ; 544.48,2762.65 cw(c581.61,2752.7) P8.15@573.9,2790.36 ; 544.48,2762.65 cw(c581.61,2752.7) P8.15@573.9,2790.36 ; 544.48,2762.65 cw(c581.61,2752.7) P8.15@573.9,2790.36 ; 544.48,2762.65 cw(c581.61,2752.7) P8.15@573.9,2790.36 ; 544.48,2762.65 cw(c581.61,2752.7) P8.15@573.9,2790.36 ; 544.48,2762.65 cw(c581.61,2752.7) P8.15@573.9,2790.36 ; 550.2,2760.2 cw(c575,2735.4) P8.15@575,2770.47 ; 550.2,2760.2 ccw(c525.4,2785) P8.15@560.47,2785 ; 550.2,2760.2 cw(c575,2735.4) P8.15@575,2770.47 ; 550.2,2760.2 ccw(c525.4,2785) P8.15@560.47,2785 ; 550.2,2760.2 cw(c575,2735.4) P8.15@575,2770.47 ; 550.2,2760.2 ccw(c525.4,2785) P8.15@560.47,2785 ; 550.2,2760.2 cw(c575,2735.4) P8.15@575,2770.47 ; 550.2,2760.2 ccw(c525.4,2785) P8.15@560.47,2785 ; 550.2,2760.2 cw(c575,2735.4) P8.15@575,2770.47 ; 550.2,2760.2 ccw(c525.4,2785) P8.15@560.47,2785 ; 552.65,2754.48 ccw(c542.7,2791.61) P8.15@580.36,2783.9 ; 552.65,2754.48 ccw(c542.7,2791.61) P8.15@580.36,2783.9 ; 552.65,2754.48 ccw(c542.7,2791.61) P8.15@580.36,2783.9 ; 552.65,2754.48 ccw(c542.7,2791.61) P8.15@580.36,2783.9 ; 552.65,2754.48 ccw(c542.7,2791.61) P8.15@580.36,2783.9 ; 552.65,2754.48 ccw(c542.7,2791.61) P8.15@580.36,2783.9 ; 552.65,2754.48 ccw(c542.7,2791.61) P8.15@580.36,2783.9 ; 552.65,2754.48 ccw(c542.7,2791.61) P8.15@580.36,2783.9 ; 552.65,2754.48 ccw(c542.7,2791.61) P8.15@580.36,2783.9 ; 552.65,2754.48 ccw(c542.7,2791.61) P8.15@580.36,2783.9 ; v2@2347.16,2232.16 cw(c2320.35,2205.35) 2358.27,2205.35 ; v2@2347.16,2232.16 cw(c2320.35,2205.35) 2358.27,2205.35 ; v2@2347.16,2232.16 cw(c2320.35,2205.35) 2358.27,2205.35 ; v2@2347.16,2232.16 cw(c2320.35,2205.35) 2358.27,2205.35 ; v2@2347.16,2232.16 cw(c2320.35,2205.35) 2358.27,2205.35 ; 2358.27,2216.3 cw(c2380.7,2216.3) v2@2364.84,2232.16 ; 2358.27,2216.3 cw(c2380.7,2216.3) v2@2364.84,2232.16 ; 2358.27,2216.3 cw(c2380.7,2216.3) v2@2364.84,2232.16 ; 2358.27,2216.3 cw(c2380.7,2216.3) v2@2364.84,2232.16 ; 2358.27,2216.3 cw(c2380.7,2216.3) v2@2364.84,2232.16
  Bottom Layer w10: P8.15@575,2785 799,3009 2065,3009 2356,2718 v2(2356,2241) ; P8.15@569.64,2786.1 cw(c607.3,2778.39) 597.35,2815.52 ; P8.15@569.64,2786.1 cw(c607.3,2778.39) 597.35,2815.52 ; P8.15@569.64,2786.1 cw(c607.3,2778.39) 597.35,2815.52 ; P8.15@569.64,2786.1 cw(c607.3,2778.39) 597.35,2815.52 ; P8.15@569.64,2786.1 cw(c607.3,2778.39) 597.35,2815.52 ; P8.15@569.64,2786.1 cw(c607.3,2778.39) 597.35,2815.52 ; P8.15@569.64,2786.1 cw(c607.3,2778.39) 597.35,2815.52 ; P8.15@569.64,2786.1 cw(c607.3,2778.39) 597.35,2815.52 ; P8.15@569.64,2786.1 cw(c607.3,2778.39) 597.35,2815.52 ; P8.15@569.64,2786.1 cw(c607.3,2778.39) 597.35,2815.52 ; P8.15@575,2799.53 ccw(c575,2834.6) 599.8,2809.8 ; P8.15@575,2799.53 ccw(c575,2834.6) 599.8,2809.8 ; P8.15@575,2799.53 ccw(c575,2834.6) 599.8,2809.8 ; P8.15@575,2799.53 ccw(c575,2834.6) 599.8,2809.8 ; P8.15@575,2799.53 ccw(c575,2834.6) 599.8,2809.8 ; P8.15@575,2809.53 ccw(c575,2868.74) 616.87,2826.87 ; P8.15@575,2809.53 ccw(c575,2868.74) 616.87,2826.87 ; P8.15@575,2809.53 ccw(c575,2868.74) 616.87,2826.87 ; P8.15@575,2809.53 ccw(c575,2868.74) 616.87,2826.87 ; P8.15@575,2809.53 ccw(c575,2868.74) 616.87,2826.87 ; P8.15@576.1,2779.64 ccw(c568.39,2817.3) 605.52,2807.35 ; P8.15@576.1,2779.64 ccw(c568.39,2817.3) 605.52,2807.35 ; P8.15@576.1,2779.64 ccw(c568.39,2817.3) 605.52,2807.35 ; P8.15@576.1,2779.64 ccw(c568.39,2817.3) 605.52,2807.35 ; P8.15@576.1,2779.64 ccw(c568.39,2817.3) 605.52,2807.35 ; P8.15@576.1,2779.64 ccw(c568.39,2817.3) 605.52,2807.35 ; P8.15@576.1,2779.64 ccw(c568.39,2817.3) 605.52,2807.35 ; P8.15@576.1,2779.64 ccw(c568.39,2817.3) 605.52,2807.35 ; P8.15@576.1,2779.64 ccw(c568.39,2817.3) 605.52,2807.35 ; P8.15@576.1,2779.64 ccw(c568.39,2817.3) 605.52,2807.35 ; P8.15@589.53,2785 cw(c624.6,2785) 599.8,2809.8 ; P8.15@589.53,2785 cw(c624.6,2785) 599.8,2809.8 ; P8.15@589.53,2785 cw(c624.6,2785) 599.8,2809.8 ; P8.15@589.53,2785 cw(c624.6,2785) 599.8,2809.8 ; P8.15@589.53,2785 cw(c624.6,2785) 599.8,2809.8 ; P8.15@599.53,2785 cw(c658.74,2785) 616.87,2826.87 ; P8.15@599.53,2785 cw(c658.74,2785) 616.87,2826.87 ; P8.15@599.53,2785 cw(c658.74,2785) 616.87,2826.87 ; P8.15@599.53,2785 cw(c658.74,2785) 616.87,2826.87 ; P8.15@599.53,2785 cw(c658.74,2785) 616.87,2826.87
9153_IRQ: P8.5 U1.31 U4.27 | length 6955.2
  Top Layer w10: U4.27@897.5,2087.57 897.5,2476.5 1028,2607 1028,2738 P8.5@1075,2785 ; U1.31@2238,2061.61 v2(2238,2229) ; 1033.13,2743.13 cw(c1075,2701.26) P8.5@1075,2760.47 ; 1033.13,2743.13 ccw(c991.26,2785) P8.5@1050.47,2785 ; 1033.13,2743.13 cw(c1075,2701.26) P8.5@1075,2760.47 ; 1033.13,2743.13 ccw(c991.26,2785) P8.5@1050.47,2785 ; 1033.13,2743.13 cw(c1075,2701.26) P8.5@1075,2760.47 ; 1033.13,2743.13 ccw(c991.26,2785) P8.5@1050.47,2785 ; 1033.13,2743.13 cw(c1075,2701.26) P8.5@1075,2760.47 ; 1033.13,2743.13 ccw(c991.26,2785) P8.5@1050.47,2785 ; 1033.13,2743.13 cw(c1075,2701.26) P8.5@1075,2760.47 ; 1033.13,2743.13 ccw(c991.26,2785) P8.5@1050.47,2785 ; 1044.48,2762.65 cw(c1081.61,2752.7) P8.5@1073.9,2790.36 ; 1044.48,2762.65 cw(c1081.61,2752.7) P8.5@1073.9,2790.36 ; 1044.48,2762.65 cw(c1081.61,2752.7) P8.5@1073.9,2790.36 ; 1044.48,2762.65 cw(c1081.61,2752.7) P8.5@1073.9,2790.36 ; 1044.48,2762.65 cw(c1081.61,2752.7) P8.5@1073.9,2790.36 ; 1044.48,2762.65 cw(c1081.61,2752.7) P8.5@1073.9,2790.36 ; 1044.48,2762.65 cw(c1081.61,2752.7) P8.5@1073.9,2790.36 ; 1044.48,2762.65 cw(c1081.61,2752.7) P8.5@1073.9,2790.36 ; 1044.48,2762.65 cw(c1081.61,2752.7) P8.5@1073.9,2790.36 ; 1044.48,2762.65 cw(c1081.61,2752.7) P8.5@1073.9,2790.36 ; 1050.2,2760.2 cw(c1075,2735.4) P8.5@1075,2770.47 ; 1050.2,2760.2 ccw(c1025.4,2785) P8.5@1060.47,2785 ; 1050.2,2760.2 cw(c1075,2735.4) P8.5@1075,2770.47 ; 1050.2,2760.2 ccw(c1025.4,2785) P8.5@1060.47,2785 ; 1050.2,2760.2 cw(c1075,2735.4) P8.5@1075,2770.47 ; 1050.2,2760.2 ccw(c1025.4,2785) P8.5@1060.47,2785 ; 1050.2,2760.2 cw(c1075,2735.4) P8.5@1075,2770.47 ; 1050.2,2760.2 ccw(c1025.4,2785) P8.5@1060.47,2785 ; 1050.2,2760.2 cw(c1075,2735.4) P8.5@1075,2770.47 ; 1050.2,2760.2 ccw(c1025.4,2785) P8.5@1060.47,2785 ; 1052.65,2754.48 ccw(c1042.7,2791.61) P8.5@1080.36,2783.9 ; 1052.65,2754.48 ccw(c1042.7,2791.61) P8.5@1080.36,2783.9 ; 1052.65,2754.48 ccw(c1042.7,2791.61) P8.5@1080.36,2783.9 ; 1052.65,2754.48 ccw(c1042.7,2791.61) P8.5@1080.36,2783.9 ; 1052.65,2754.48 ccw(c1042.7,2791.61) P8.5@1080.36,2783.9 ; 1052.65,2754.48 ccw(c1042.7,2791.61) P8.5@1080.36,2783.9 ; 1052.65,2754.48 ccw(c1042.7,2791.61) P8.5@1080.36,2783.9 ; 1052.65,2754.48 ccw(c1042.7,2791.61) P8.5@1080.36,2783.9 ; 1052.65,2754.48 ccw(c1042.7,2791.61) P8.5@1080.36,2783.9 ; 1052.65,2754.48 ccw(c1042.7,2791.61) P8.5@1080.36,2783.9 ; 2238,2096.37 ccw(c2247.55,2096.37) U1.31@2240.8,2089.62 ; 2238,2096.37 ccw(c2247.55,2096.37) U1.31@2240.8,2089.62 ; 2238,2096.37 ccw(c2247.55,2096.37) U1.31@2240.8,2089.62 ; 2238,2096.37 ccw(c2247.55,2096.37) U1.31@2240.8,2089.62 ; 2238,2096.37 ccw(c2247.55,2096.37) U1.31@2240.8,2089.62
  Bottom Layer w10: P8.5@1075,2785 1217,2927 2033.86,2927 2247,2713.86 2247,2238 v2(2238,2229) ; P8.5@1069.64,2786.1 cw(c1107.3,2778.39) 1097.35,2815.52 ; P8.5@1069.64,2786.1 cw(c1107.3,2778.39) 1097.35,2815.52 ; P8.5@1069.64,2786.1 cw(c1107.3,2778.39) 1097.35,2815.52 ; P8.5@1069.64,2786.1 cw(c1107.3,2778.39) 1097.35,2815.52 ; P8.5@1069.64,2786.1 cw(c1107.3,2778.39) 1097.35,2815.52 ; P8.5@1069.64,2786.1 cw(c1107.3,2778.39) 1097.35,2815.52 ; P8.5@1069.64,2786.1 cw(c1107.3,2778.39) 1097.35,2815.52 ; P8.5@1069.64,2786.1 cw(c1107.3,2778.39) 1097.35,2815.52 ; P8.5@1069.64,2786.1 cw(c1107.3,2778.39) 1097.35,2815.52 ; P8.5@1069.64,2786.1 cw(c1107.3,2778.39) 1097.35,2815.52 ; P8.5@1075,2799.53 ccw(c1075,2834.6) 1099.8,2809.8 ; P8.5@1075,2799.53 ccw(c1075,2834.6) 1099.8,2809.8 ; P8.5@1075,2799.53 ccw(c1075,2834.6) 1099.8,2809.8 ; P8.5@1075,2799.53 ccw(c1075,2834.6) 1099.8,2809.8 ; P8.5@1075,2799.53 ccw(c1075,2834.6) 1099.8,2809.8 ; P8.5@1075,2809.53 ccw(c1075,2868.74) 1116.87,2826.87 ; P8.5@1075,2809.53 ccw(c1075,2868.74) 1116.87,2826.87 ; P8.5@1075,2809.53 ccw(c1075,2868.74) 1116.87,2826.87 ; P8.5@1075,2809.53 ccw(c1075,2868.74) 1116.87,2826.87 ; P8.5@1075,2809.53 ccw(c1075,2868.74) 1116.87,2826.87 ; P8.5@1076.1,2779.64 ccw(c1068.39,2817.3) 1105.52,2807.35 ; P8.5@1076.1,2779.64 ccw(c1068.39,2817.3) 1105.52,2807.35 ; P8.5@1076.1,2779.64 ccw(c1068.39,2817.3) 1105.52,2807.35 ; P8.5@1076.1,2779.64 ccw(c1068.39,2817.3) 1105.52,2807.35 ; P8.5@1076.1,2779.64 ccw(c1068.39,2817.3) 1105.52,2807.35 ; P8.5@1076.1,2779.64 ccw(c1068.39,2817.3) 1105.52,2807.35 ; P8.5@1076.1,2779.64 ccw(c1068.39,2817.3) 1105.52,2807.35 ; P8.5@1076.1,2779.64 ccw(c1068.39,2817.3) 1105.52,2807.35 ; P8.5@1076.1,2779.64 ccw(c1068.39,2817.3) 1105.52,2807.35 ; P8.5@1076.1,2779.64 ccw(c1068.39,2817.3) 1105.52,2807.35 ; P8.5@1089.53,2785 cw(c1124.6,2785) 1099.8,2809.8 ; P8.5@1089.53,2785 cw(c1124.6,2785) 1099.8,2809.8 ; P8.5@1089.53,2785 cw(c1124.6,2785) 1099.8,2809.8 ; P8.5@1089.53,2785 cw(c1124.6,2785) 1099.8,2809.8 ; P8.5@1089.53,2785 cw(c1124.6,2785) 1099.8,2809.8 ; P8.5@1099.53,2785 cw(c1158.74,2785) 1116.87,2826.87 ; P8.5@1099.53,2785 cw(c1158.74,2785) 1116.87,2826.87 ; P8.5@1099.53,2785 cw(c1158.74,2785) 1116.87,2826.87 ; P8.5@1099.53,2785 cw(c1158.74,2785) 1116.87,2826.87 ; P8.5@1099.53,2785 cw(c1158.74,2785) 1116.87,2826.87 ; v2@2229.16,2237.84 ccw(c2186.09,2280.91) 2247,2280.91 ; v2@2229.16,2237.84 ccw(c2186.09,2280.91) 2247,2280.91 ; v2@2229.16,2237.84 ccw(c2186.09,2280.91) 2247,2280.91 ; v2@2229.16,2237.84 ccw(c2186.09,2280.91) 2247,2280.91 ; v2@2229.16,2237.84 ccw(c2186.09,2280.91) 2247,2280.91 ; 2235.78,2249.31 ccw(c2248,2242.26) v2@2239.51,2231 ; 2235.78,2249.31 ccw(c2248,2242.26) v2@2239.51,2231 ; 2235.78,2249.31 ccw(c2248,2242.26) v2@2239.51,2231 ; 2235.78,2249.31 ccw(c2248,2242.26) v2@2239.51,2231 ; 2235.78,2249.31 ccw(c2248,2242.26) v2@2239.51,2231 ; 2235.78,2249.31 ccw(c2248,2242.26) v2@2239.51,2231 ; 2235.78,2249.31 ccw(c2248,2242.26) v2@2239.51,2231 ; 2235.78,2249.31 ccw(c2248,2242.26) v2@2239.51,2231 ; 2235.78,2249.31 ccw(c2248,2242.26) v2@2239.51,2231 ; 2235.78,2249.31 ccw(c2248,2242.26) v2@2239.51,2231 ; v2@2236.23,2230.77 ccw(c2210.24,2256.76) 2247,2256.76 ; v2@2236.23,2230.77 ccw(c2210.24,2256.76) 2247,2256.76 ; v2@2236.23,2230.77 ccw(c2210.24,2256.76) 2247,2256.76 ; v2@2236.23,2230.77 ccw(c2210.24,2256.76) 2247,2256.76 ; v2@2236.23,2230.77 ccw(c2210.24,2256.76) 2247,2256.76 ; v2@2237.51,2241.49 ccw(c2237.16,2250.6) 2245.05,2246.04 ; v2@2237.51,2241.49 ccw(c2237.16,2250.6) 2245.05,2246.04 ; v2@2237.51,2241.49 ccw(c2237.16,2250.6) 2245.05,2246.04 ; v2@2237.51,2241.49 ccw(c2237.16,2250.6) 2245.05,2246.04 ; v2@2237.51,2241.49 ccw(c2237.16,2250.6) 2245.05,2246.04 ; v2@2237.51,2241.49 ccw(c2237.16,2250.6) 2245.05,2246.04 ; v2@2237.51,2241.49 ccw(c2237.16,2250.6) 2245.05,2246.04 ; v2@2237.51,2241.49 ccw(c2237.16,2250.6) 2245.05,2246.04 ; v2@2237.51,2241.49 ccw(c2237.16,2250.6) 2245.05,2246.04 ; v2@2237.51,2241.49 ccw(c2237.16,2250.6) 2245.05,2246.04 ; 2241.44,2259.1 ccw(c2254.86,2251.35) v2@2245.53,2238.98 ; 2241.44,2259.1 ccw(c2254.86,2251.35) v2@2245.53,2238.98 ; 2241.44,2259.1 ccw(c2254.86,2251.35) v2@2245.53,2238.98 ; 2241.44,2259.1 ccw(c2254.86,2251.35) v2@2245.53,2238.98 ; 2241.44,2259.1 ccw(c2254.86,2251.35) v2@2245.53,2238.98 ; 2241.44,2259.1 ccw(c2254.86,2251.35) v2@2245.53,2238.98 ; 2241.44,2259.1 ccw(c2254.86,2251.35) v2@2245.53,2238.98 ; 2241.44,2259.1 ccw(c2254.86,2251.35) v2@2245.53,2238.98 ; 2241.44,2259.1 ccw(c2254.86,2251.35) v2@2245.53,2238.98 ; 2241.44,2259.1 ccw(c2254.86,2251.35) v2@2245.53,2238.98 ; 2245.05,2246.04 ccw(c2250.39,2242.96) v2@2246.3,2238.35 ; 2245.05,2246.04 ccw(c2250.39,2242.96) v2@2246.3,2238.35 ; 2245.05,2246.04 ccw(c2250.39,2242.96) v2@2246.3,2238.35 ; 2245.05,2246.04 ccw(c2250.39,2242.96) v2@2246.3,2238.35 ; 2245.05,2246.04 ccw(c2250.39,2242.96) v2@2246.3,2238.35 ; 2245.05,2246.04 ccw(c2250.39,2242.96) v2@2246.3,2238.35 ; 2245.05,2246.04 ccw(c2250.39,2242.96) v2@2246.3,2238.35 ; 2245.05,2246.04 ccw(c2250.39,2242.96) v2@2246.3,2238.35 ; 2245.05,2246.04 ccw(c2250.39,2242.96) v2@2246.3,2238.35 ; 2245.05,2246.04 ccw(c2250.39,2242.96) v2@2246.3,2238.35
9153_MISO: P8.11 U1.27 U4.30 | length 6691.6
  Top Layer w10: P8.11@775,2785 726,2736 726,2599 838.45,2486.55 U4.30@838.45,2087.57 ; v2(2311,2285) 2311,2294 2311,2222.3 2300.5,2211.8 2300.5,2182.5 2318.9,2164.1 U1.27@2318.9,2059.45 ; 733.13,2743.13 cw(c775,2701.26) P8.11@775,2760.47 ; 733.13,2743.13 ccw(c691.26,2785) P8.11@750.47,2785 ; 733.13,2743.13 cw(c775,2701.26) P8.11@775,2760.47 ; 733.13,2743.13 ccw(c691.26,2785) P8.11@750.47,2785 ; 733.13,2743.13 cw(c775,2701.26) P8.11@775,2760.47 ; 733.13,2743.13 ccw(c691.26,2785) P8.11@750.47,2785 ; 733.13,2743.13 cw(c775,2701.26) P8.11@775,2760.47 ; 733.13,2743.13 ccw(c691.26,2785) P8.11@750.47,2785 ; 733.13,2743.13 cw(c775,2701.26) P8.11@775,2760.47 ; 733.13,2743.13 ccw(c691.26,2785) P8.11@750.47,2785 ; 744.48,2762.65 cw(c781.61,2752.7) P8.11@773.9,2790.36 ; 744.48,2762.65 cw(c781.61,2752.7) P8.11@773.9,2790.36 ; 744.48,2762.65 cw(c781.61,2752.7) P8.11@773.9,2790.36 ; 744.48,2762.65 cw(c781.61,2752.7) P8.11@773.9,2790.36 ; 744.48,2762.65 cw(c781.61,2752.7) P8.11@773.9,2790.36 ; 744.48,2762.65 cw(c781.61,2752.7) P8.11@773.9,2790.36 ; 744.48,2762.65 cw(c781.61,2752.7) P8.11@773.9,2790.36 ; 744.48,2762.65 cw(c781.61,2752.7) P8.11@773.9,2790.36 ; 744.48,2762.65 cw(c781.61,2752.7) P8.11@773.9,2790.36 ; 744.48,2762.65 cw(c781.61,2752.7) P8.11@773.9,2790.36 ; 750.2,2760.2 cw(c775,2735.4) P8.11@775,2770.47 ; 750.2,2760.2 ccw(c725.4,2785) P8.11@760.47,2785 ; 750.2,2760.2 cw(c775,2735.4) P8.11@775,2770.47 ; 750.2,2760.2 ccw(c725.4,2785) P8.11@760.47,2785 ; 750.2,2760.2 cw(c775,2735.4) P8.11@775,2770.47 ; 750.2,2760.2 ccw(c725.4,2785) P8.11@760.47,2785 ; 750.2,2760.2 cw(c775,2735.4) P8.11@775,2770.47 ; 750.2,2760.2 ccw(c725.4,2785) P8.11@760.47,2785 ; 750.2,2760.2 cw(c775,2735.4) P8.11@775,2770.47 ; 750.2,2760.2 ccw(c725.4,2785) P8.11@760.47,2785 ; 752.65,2754.48 ccw(c742.7,2791.61) P8.11@780.36,2783.9 ; 752.65,2754.48 ccw(c742.7,2791.61) P8.11@780.36,2783.9 ; 752.65,2754.48 ccw(c742.7,2791.61) P8.11@780.36,2783.9 ; 752.65,2754.48 ccw(c742.7,2791.61) P8.11@780.36,2783.9 ; 752.65,2754.48 ccw(c742.7,2791.61) P8.11@780.36,2783.9 ; 752.65,2754.48 ccw(c742.7,2791.61) P8.11@780.36,2783.9 ; 752.65,2754.48 ccw(c742.7,2791.61) P8.11@780.36,2783.9 ; 752.65,2754.48 ccw(c742.7,2791.61) P8.11@780.36,2783.9 ; 752.65,2754.48 ccw(c742.7,2791.61) P8.11@780.36,2783.9 ; 752.65,2754.48 ccw(c742.7,2791.61) P8.11@780.36,2783.9 ; v2@2302.16,2276.16 cw(c2280.82,2254.82) 2311,2254.82 ; v2@2302.16,2276.16 cw(c2280.82,2254.82) 2311,2254.82 ; v2@2302.16,2276.16 cw(c2280.82,2254.82) 2311,2254.82 ; v2@2302.16,2276.16 cw(c2280.82,2254.82) 2311,2254.82 ; v2@2302.16,2276.16 cw(c2280.82,2254.82) 2311,2254.82 ; 2311,2254.82 cw(c2341.18,2254.82) v2@2319.84,2276.16 ; 2311,2254.82 cw(c2341.18,2254.82) v2@2319.84,2276.16 ; 2311,2254.82 cw(c2341.18,2254.82) v2@2319.84,2276.16 ; 2311,2254.82 cw(c2341.18,2254.82) v2@2319.84,2276.16 ; 2311,2254.82 cw(c2341.18,2254.82) v2@2319.84,2276.16
  Bottom Layer w10: P8.11@775,2785 967,2977 2051.75,2977 2324,2704.75 2324,2307 ; v2@2317,2288 2311,2294 2324,2307 ; P8.11@769.64,2786.1 cw(c807.3,2778.39) 797.35,2815.52 ; P8.11@769.64,2786.1 cw(c807.3,2778.39) 797.35,2815.52 ; P8.11@769.64,2786.1 cw(c807.3,2778.39) 797.35,2815.52 ; P8.11@769.64,2786.1 cw(c807.3,2778.39) 797.35,2815.52 ; P8.11@769.64,2786.1 cw(c807.3,2778.39) 797.35,2815.52 ; P8.11@769.64,2786.1 cw(c807.3,2778.39) 797.35,2815.52 ; P8.11@769.64,2786.1 cw(c807.3,2778.39) 797.35,2815.52 ; P8.11@769.64,2786.1 cw(c807.3,2778.39) 797.35,2815.52 ; P8.11@769.64,2786.1 cw(c807.3,2778.39) 797.35,2815.52 ; P8.11@769.64,2786.1 cw(c807.3,2778.39) 797.35,2815.52 ; P8.11@775,2799.53 ccw(c775,2834.6) 799.8,2809.8 ; P8.11@775,2799.53 ccw(c775,2834.6) 799.8,2809.8 ; P8.11@775,2799.53 ccw(c775,2834.6) 799.8,2809.8 ; P8.11@775,2799.53 ccw(c775,2834.6) 799.8,2809.8 ; P8.11@775,2799.53 ccw(c775,2834.6) 799.8,2809.8 ; P8.11@775,2809.53 ccw(c775,2868.74) 816.87,2826.87 ; P8.11@775,2809.53 ccw(c775,2868.74) 816.87,2826.87 ; P8.11@775,2809.53 ccw(c775,2868.74) 816.87,2826.87 ; P8.11@775,2809.53 ccw(c775,2868.74) 816.87,2826.87 ; P8.11@775,2809.53 ccw(c775,2868.74) 816.87,2826.87 ; P8.11@776.1,2779.64 ccw(c768.39,2817.3) 805.52,2807.35 ; P8.11@776.1,2779.64 ccw(c768.39,2817.3) 805.52,2807.35 ; P8.11@776.1,2779.64 ccw(c768.39,2817.3) 805.52,2807.35 ; P8.11@776.1,2779.64 ccw(c768.39,2817.3) 805.52,2807.35 ; P8.11@776.1,2779.64 ccw(c768.39,2817.3) 805.52,2807.35 ; P8.11@776.1,2779.64 ccw(c768.39,2817.3) 805.52,2807.35 ; P8.11@776.1,2779.64 ccw(c768.39,2817.3) 805.52,2807.35 ; P8.11@776.1,2779.64 ccw(c768.39,2817.3) 805.52,2807.35 ; P8.11@776.1,2779.64 ccw(c768.39,2817.3) 805.52,2807.35 ; P8.11@776.1,2779.64 ccw(c768.39,2817.3) 805.52,2807.35 ; P8.11@789.53,2785 cw(c824.6,2785) 799.8,2809.8 ; P8.11@789.53,2785 cw(c824.6,2785) 799.8,2809.8 ; P8.11@789.53,2785 cw(c824.6,2785) 799.8,2809.8 ; P8.11@789.53,2785 cw(c824.6,2785) 799.8,2809.8 ; P8.11@789.53,2785 cw(c824.6,2785) 799.8,2809.8 ; P8.11@799.53,2785 cw(c858.74,2785) 816.87,2826.87 ; P8.11@799.53,2785 cw(c858.74,2785) 816.87,2826.87 ; P8.11@799.53,2785 cw(c858.74,2785) 816.87,2826.87 ; P8.11@799.53,2785 cw(c858.74,2785) 816.87,2826.87 ; P8.11@799.53,2785 cw(c858.74,2785) 816.87,2826.87 ; v2@2321.87,2291.18 cw(c2333.31,2297.69) 2324,2307 ; v2@2321.87,2291.18 cw(c2333.31,2297.69) 2324,2307 ; v2@2321.87,2291.18 cw(c2333.31,2297.69) 2324,2307 ; v2@2321.87,2291.18 cw(c2333.31,2297.69) 2324,2307 ; v2@2321.87,2291.18 cw(c2333.31,2297.69) 2324,2307